# Altium PCB PCB.PcbDoc
Units mm, origin at the board's own origin, x right, y up, seen from the top; angles counter-clockwise.
Board outline 70 x 35.05 mm, 4 copper layers (L1 (Sig), L2 (GND), L3 (GND), L4 (Sig)), stack 1.591 mm thick; 39 components, 40 nets, 205 pads, 130 vias.
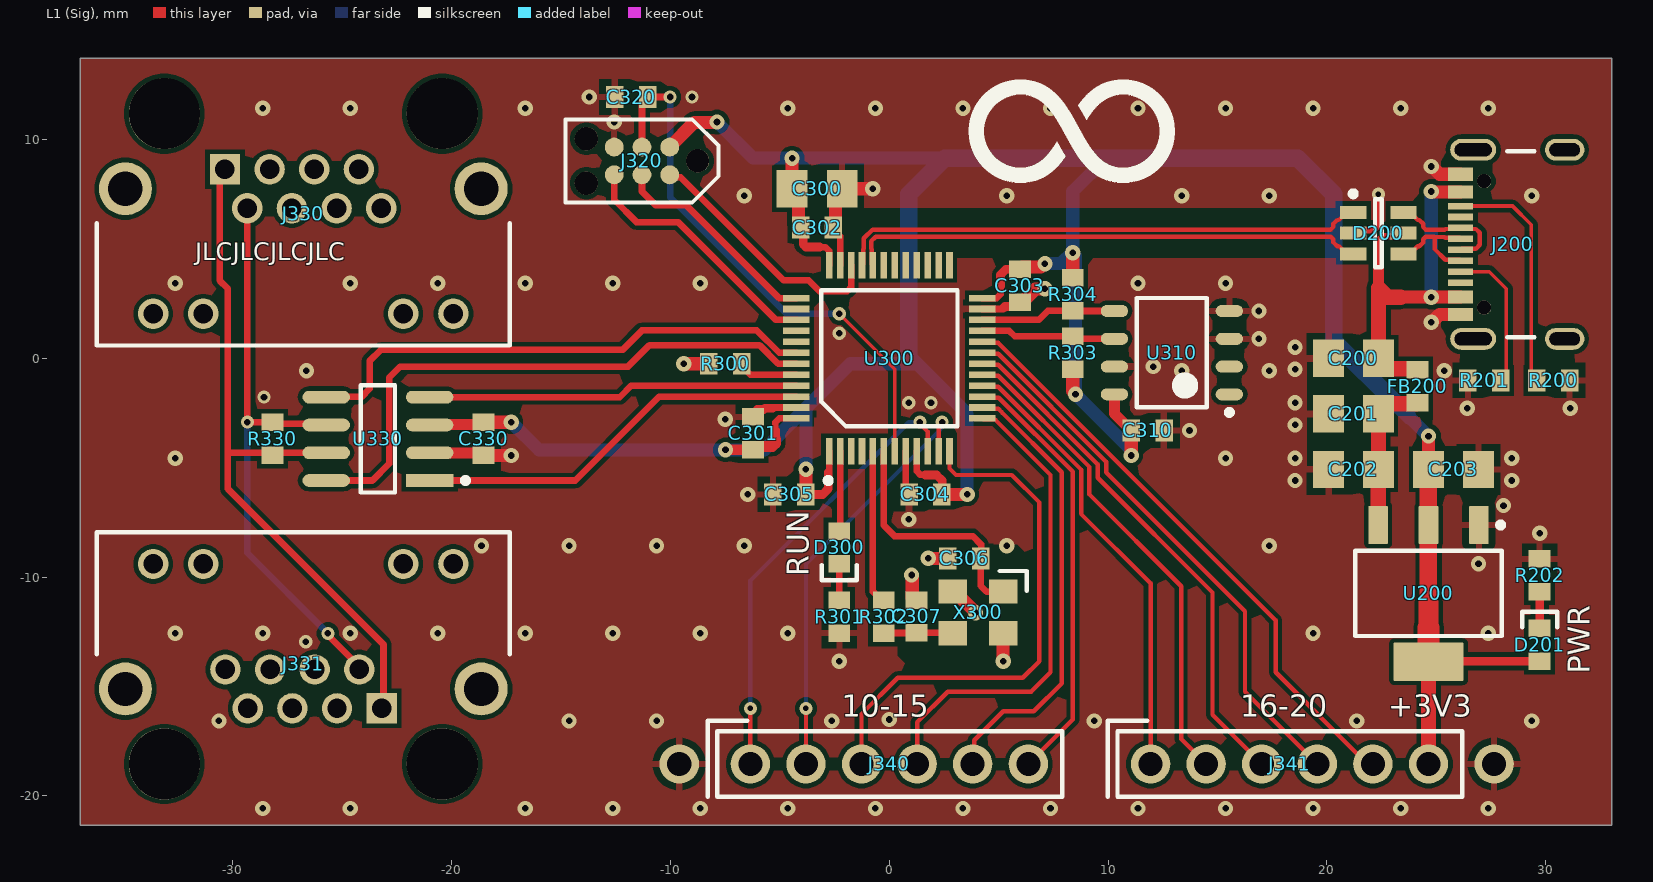
[diagram p0: L1 (Sig) view]
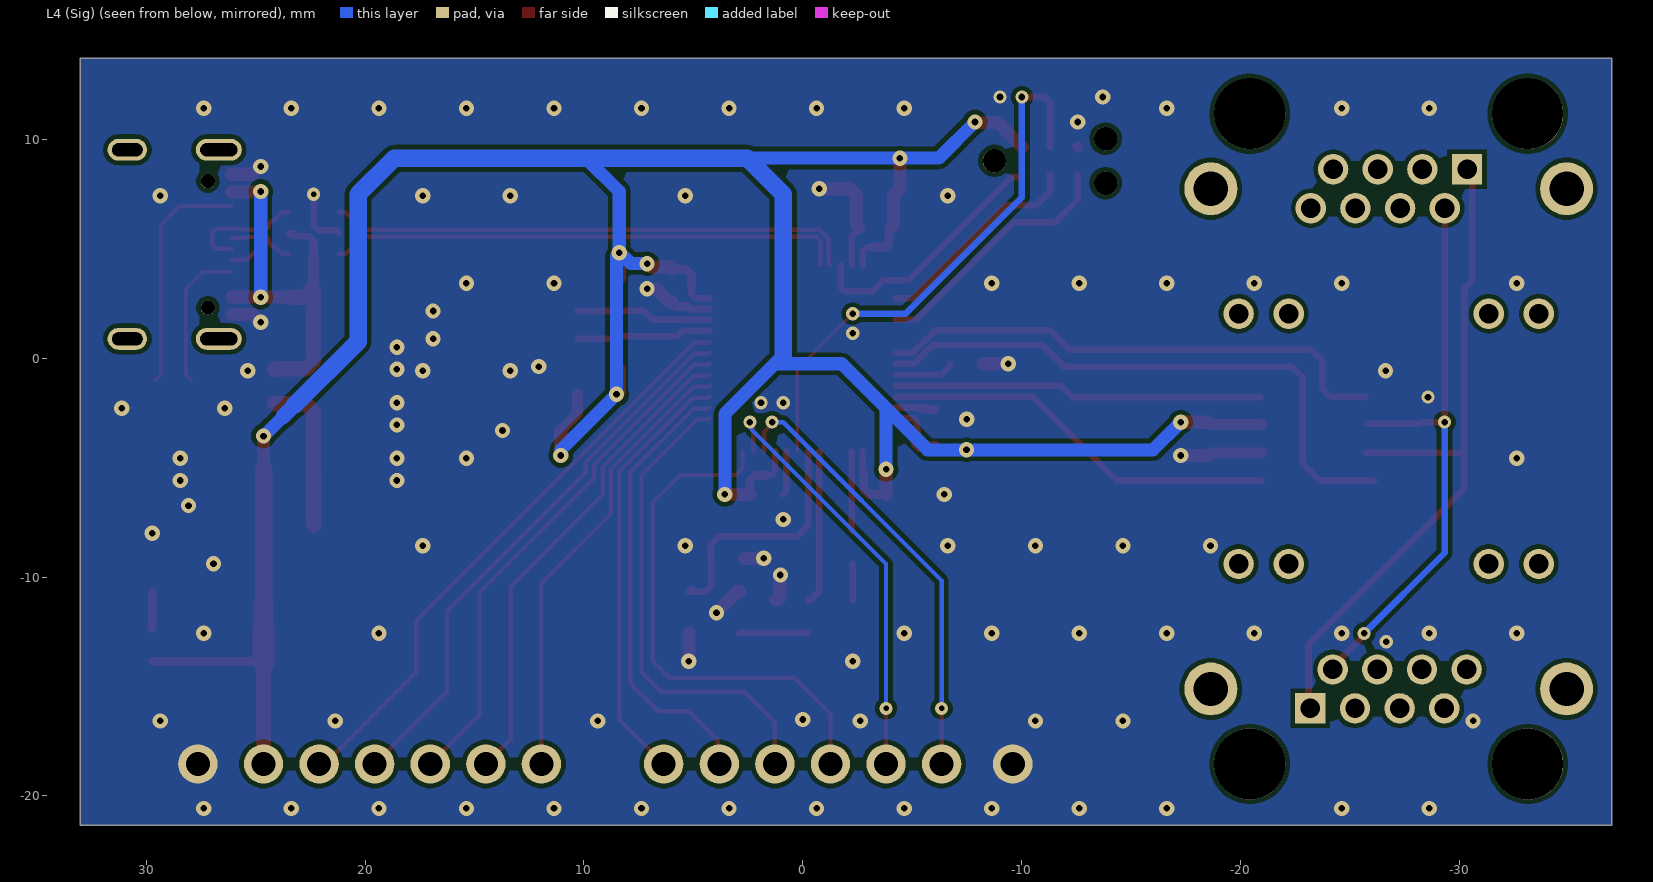
[diagram p1: L4 (Sig) view, seen from below]
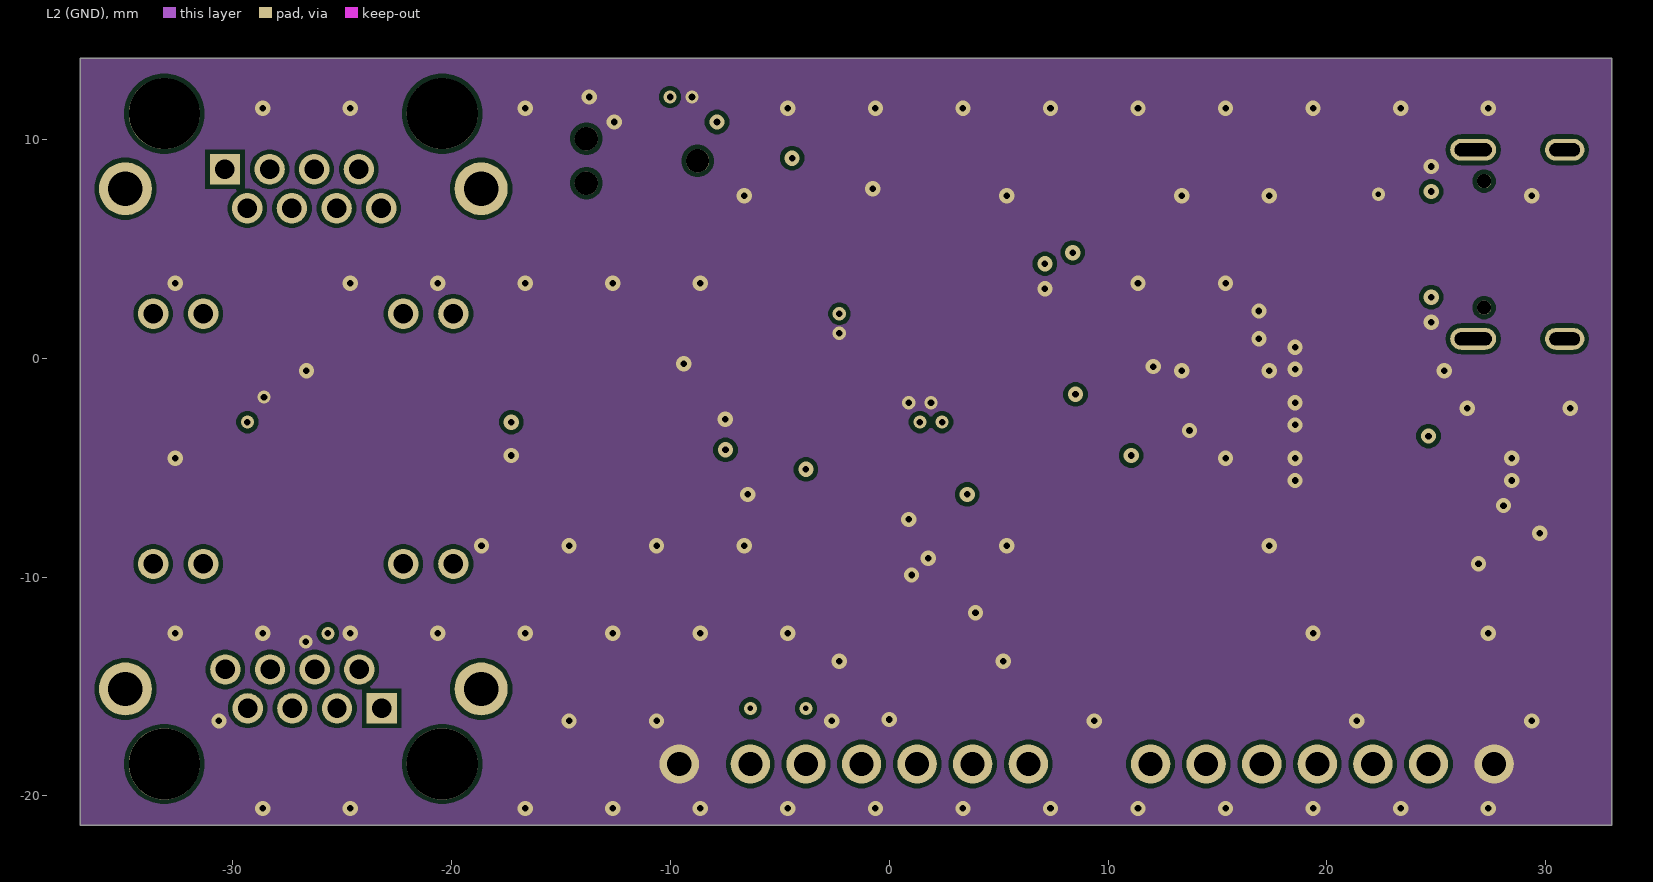
[diagram p2: L2 (GND)]
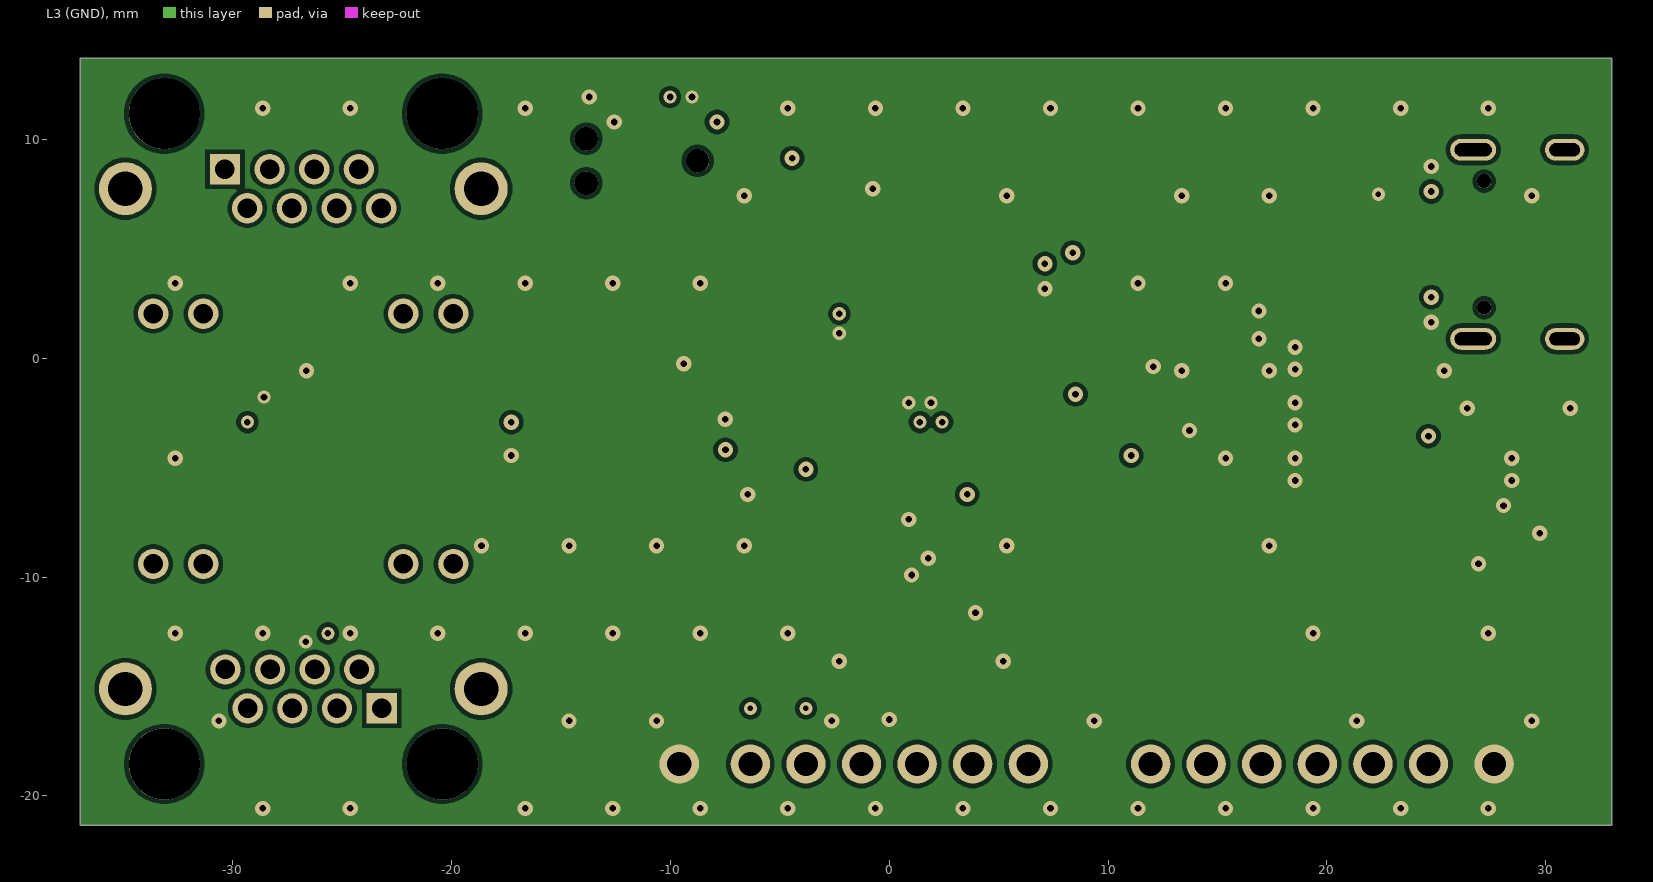
[diagram p3: L3 (GND)]
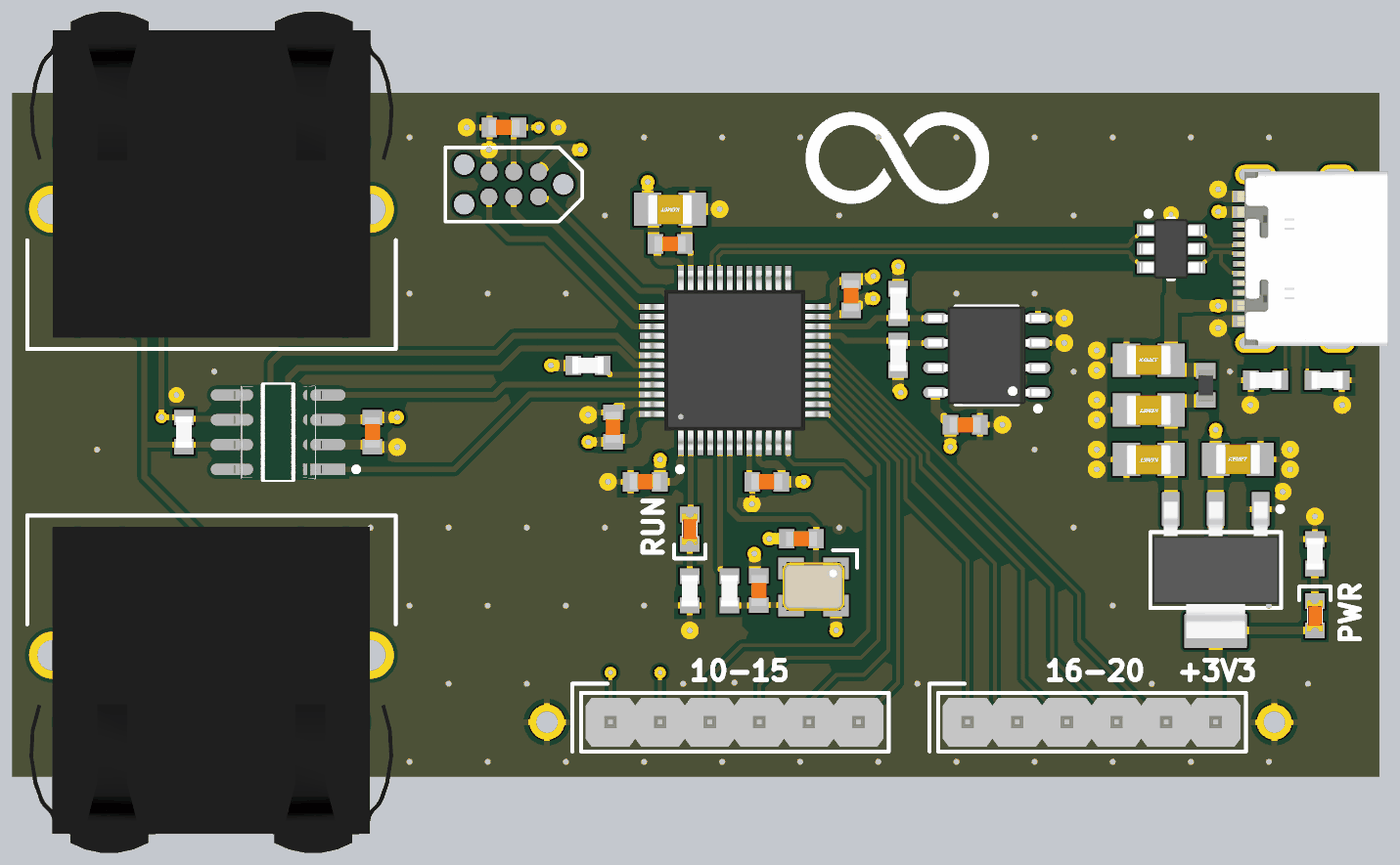
[diagram p4: 3D render of the assembled board from above, using the file's embedded part models]

## Layer stack, top to bottom
Top Solder: solder mask 0.0254, SM-001, Dk 4
L1 (Sig): signal copper 0.035
Dielectric 2: prepreg 0.2104, PP-017, Dk 4.4
L2 (GND): signal copper 0.0175
Dielectric 3: core 1.065, Core-039, Dk 4.6
L3 (GND): signal copper 0.0175
Dielectric 4: prepreg 0.2104, PP-017, Dk 4.4
L4 (Sig): signal copper 0.035
Bottom Solder: solder mask 0.0254, SM-001, Dk 4

## Board outline
-36.98,-21.336 33.02,-21.336 33.02,13.716 -36.98,13.716

## Design rules (kind name [scope] priority, off if disabled: settings)
Clearance [All] p1: gap=0.2 ignorepadtopadclearanceinfootprint=FALSE except(0.089: Arc-Arc Arc-Track Track-Track)
DiffPairsRouting [All] p1: maxlimit=0.127 minlimit=0.127 mostfreqgap=0.127 toplayer_minwidth=0.203 toplayer_maxwidth=0.203 toplayer_prefwidth=0.203 midlayer1_minwidth=0.148 midlayer1_maxwidth=0.148 midlayer1_prefwidth=0.148 midlayer2_minwidth=0.148 midlayer2_maxwidth=0.148 midlayer2_prefwidth=0.148 bottomlayer_minwidth=0.203 bottomlayer_maxwidth=0.203 bottomlayer_prefwidth=0.203 impedanceprofiledriven=TRUE impedanceprofileid={6FCCEE7B-1916-4830-BA7E-104E53B21CAD} impedanceprofilevalue=90.000000 maxuncoupledlength=12.7
HoleSize [All] p1: absolutevalues=TRUE maxlimit=6.3 minlimit=0.2 maxpercent=80.000 minpercent=20.000
MinimumSolderMaskSliver [All] p1: minsoldermaskwidth=0.08
PolygonConnect [All] p1: thpad.connectstyle=Relief thpad.reliefconductorwidth=0.3 thpad.reliefentries=4 thpad.polygonreliefangle="90 Angle" thpad.airgapwidth=0.3 smdpad.connectstyle=Relief smdpad.reliefconductorwidth=0.3 smdpad.reliefentries=4 smdpad.polygonreliefangle="90 Angle" smdpad.airgapwidth=0.3 via.connectstyle=Direct via.reliefconductorwidth=0.254 via.reliefentries=4 via.polygonreliefangle="90 Angle" via.airgapwidth=0.254
RoutingVias [All] p1: holewidth=0.711 width=1.27 viastyle="Through Hole" minholewidth=0.3 minwidth=0.4 maxholewidth=0.711 maxwidth=1.27
SilkToSolderMaskClearance [IsPad] p1: minsilkscreentomaskgap=0.15 clearancetoexposedcopper=TRUE
SolderMaskExpansion [All] p1: expansion=0.102 istentingtop=FALSE
UnRoutedNet [All] p1: checkbadconnections=TRUE
Width [All] p1: maxlimit=1 minlimit=0.089 preferedwidth=0.3 midlayer1_minwidth=0.254 midlayer1_maxwidth=0.254 midlayer1_prefwidth=0.254 midlayer2_minwidth=0.254 midlayer2_maxwidth=0.254 midlayer2_prefwidth=0.254 minimp=50.000000 maximp=50.000000 favimp=50.000000
25 further rules are at their usual default settings.

## Classes and differential pairs
differential pair class DIFF_USB_CON: USB_CON
differential pair class DIFF_USB: USB
component class U_Main: C300 C301 C302 C303 C304 C305 C306 C307 C310 C320 C330 D300 J320 J330 J331 J340 J341 R300 R301 R302 R303 R304 R330 U300 U310 U330 X300
component class Power: C200 C201 C202 C203 D200 D201 FB200 J200 R200 R201 R202 U200
differential pair USB_CON: +USB_CON_P -USB_CON_N
differential pair USB: +USB_P -USB_N

## Components (designator, comment, footprint, x,y, rotation, side; value= is the part's Value field where it differs from the comment)
C200 "2u2" CAP_0805 21.209,0 r0 top
C201 "2u2" CAP_0805 21.209,-2.54 r180 top
C202 "1u" CAP_0805 21.209,-5.08 r180 top
C203 "1u" CAP_0805 25.781,-5.08 r0 top
C300 "4u7" CAP_0805 -3.302,7.747 r180 top
C301 "100n" CAP_0603 -6.223,-3.429 r270 top
C302 "100n" CAP_0603 -3.302,5.969 r180 top
C303 "100n" CAP_0603 5.969,3.314 r90 top
C304 "100n" CAP_0603 1.651,-6.223 r0 top
C305 "100n" CAP_0603 -4.572,-6.223 r0 top
C306 "10p" CAP_0603 3.429,-9.144 r180 top
C307 "10p" CAP_0603 1.246,-11.799 r270 top
C310 "100n" CAP_0603 11.811,-3.302 r0 top
C320 "100n" CAP_0603 -11.799,11.938 r0 top
C330 "100n" CAP_0603 -18.542,-3.683 r90 top
D200 "USBLC6-2SC6" STM-SOT23-6L_V 22.345,5.715 r0 top
D201 "RED" LED_0603_RED 29.718,-13.093 r270 top
D300 "RED" LED_0603_RED -2.286,-8.648 r90 top
FB200 "120R" FB_0603 24.13,-1.282 r270 top
J200 "USB4105-GF-A-060" USB4105-GF-A-060 28.484,5.205 r90 top
J320 "TC2030-NL" TC2030-NL-FP -11.303,9.017 r180 top
J330 "2-406549-1" FP-2-406549-1-MFG -26.78,9.056 r180 top
J331 "2-406549-1" FP-2-406549-1-MFG -26.78,-16.422 r0 top
J340 "G800W302018EU" G800W302018EU 0,-18.542 r90 top
J341 "G800W302018EU" G800W302018EU 18.288,-18.542 r90 top
R200 "5k1" RES_0603 30.341,-1.016 r180 top
R201 "5k1" RES_0603 27.19,-1.016 r0 top
R202 "1k" RES_0603 29.718,-9.918 r90 top
R300 "5k1" RES_0603 -7.493,-0.254 r180 top
R301 "1k" RES_0603 -2.286,-11.811 r270 top
R302 "0R" RES_0603 -0.254,-11.811 r270 top
R303 "2k2" RES_0603 8.382,0.254 r270 top
R304 "2k2" RES_0603 8.382,2.921 r90 top
R330 "120R" RES_0603 -28.194,-3.683 r270 top
U200 "TLV1117LV33DCYR" DCY0004A_N 24.638,-10.745 r270 top
U300 "STM32L552" LQFP48 0,0 r90 top
U310 "M24C08-WMN6TP" STM-SOIC-8_L 12.912,0.254 r180 top
U330 "TCAN334GDR" FP-D0008A-IPC_B -23.368,-3.683 r180 top
X300 "24MHz" XTAL_3225 4.047,-11.618 r180 top

## Footprints (in the part's own frame and the unit in brackets; to place one, negate y for a bottom-side part, rotate by r counter-clockwise, add the part's x,y. Pads: shape width x height; smd on the part's side, far side on the other; paste and mask are expansions set on the pad)
CAP_0603 [mm]
  rect 0.8x1 smd: 1(-0.75,0) 2(0.75,0)
  body extent -0.8,-0.4 0.8,0.4, height 0.51
CAP_0805 [mm]
  rect 1.4x1.7 smd: 1(-1.143,0) 2(1.143,0)
  body extent -1.15,-0.76 1.15,0.79, height 1.01
DCY0004A_N [mm] "SOT223, 4-Leads, Body 6.7x3.7mm, Pitch 2.3mm, IPC Medium Density"
  rrect11% 1.75x0.9 smd: 1(-3.125,2.3) 2(-3.125,0) 3(-3.125,-2.3)
  rrect6% 1.75x3.2 smd: 4(3.125,0)
  silkscreen extent -3.25,-3.35 1.95,3.43, body extent -3.5,-3.25 3.5,3.25, height 1.62
FB_0603 [mm]
  rect 0.8x1 smd: 1(-0.75,0) 2(0.75,0)
  body extent -0.8,-0.4 0.8,0.4, height 0.81
FP-2-406549-1-MFG [mm]
  rect 1.39x1.39 hole 0.89 paste-1000 mask+0: 1(3.58,0.42)
  round 1.39 hole 0.89 paste-1000 mask+0: 2(2.56,2.2) 3(1.54,0.42) 4(0.52,2.2) 5(-0.5,0.42) 6(-1.52,2.2) 7(-2.54,0.42) 8(-3.56,2.2) 9(-6.86,7.02) 10(-4.57,7.02) 11(4.57,7.02) 12(6.86,7.02)
  round 2.42 hole 1.57 paste-1000 mask+0: 13(-8.13,1.31) 14(8.13,1.31)
  round 3.25 hole 3.25 unplated paste-1000 mask+0: ""(-6.35,-2.12) ""(6.35,-2.12)
  silkscreen extent -9.44,2.9 9.44,8.47, body extent -9.53,-8.57 9.53,8.57, height 0.25
FP-D0008A-IPC_B [mm]
  rect 2.169x0.582 smd paste+0 mask+0: 1(-2.364,1.905)
  rrect100% 2.169x0.582 smd paste+0 mask+0: 2(-2.364,0.635) 3(-2.364,-0.635) 4(-2.364,-1.905) 5(2.364,-1.905) 6(2.364,-0.635) 7(2.364,0.635) 8(2.364,1.905)
  silkscreen extent -4.12,-2.45 0.78,2.45, body extent -3.7,-2.7 3.7,2.7, height 0.25
G800W302018EU [mm]
  round 1.8 hole 1.1 mask+0.07: 1(0,6.35) 2(0,3.81) 3(0,1.27) 4(0,-1.27) 5(0,-3.81) 6(0,-6.35)
  silkscreen extent -1.5,-7.9 1.97,8.3, body extent -1.25,-7.62 1.25,7.62, height 8.61
LED_0603_RED [mm]
  rect 0.8x1 smd: A(0.75,0) K(-0.75,0)
  silkscreen extent -1.5,-0.8 -0.8,0.8, body extent -0.8,-0.4 0.8,0.4, height 0.6
LQFP48 [mm]
  rect 1.2x0.3 smd mask+0.05: 1(-4.25,2.75) 2(-4.25,2.25) 3(-4.25,1.75) 4(-4.25,1.25) 5(-4.25,0.75) 6(-4.25,0.25) 7(-4.25,-0.25) 8(-4.25,-0.75) 9(-4.25,-1.25) 10(-4.25,-1.75) 11(-4.25,-2.25) 12(-4.25,-2.75) 25(4.25,-2.75) 26(4.25,-2.25) 27(4.25,-1.75) 28(4.25,-1.25) 29(4.25,-0.75) 30(4.25,-0.25) 31(4.25,0.25) 32(4.25,0.75) 33(4.25,1.25) 34(4.25,1.75) 35(4.25,2.25) 36(4.25,2.75)
  rect 0.3x1.2 smd mask+0.05: 13(-2.75,-4.25) 14(-2.25,-4.25) 15(-1.75,-4.25) 16(-1.25,-4.25) 17(-0.75,-4.25) 18(-0.25,-4.25) 19(0.25,-4.25) 20(0.75,-4.25) 21(1.25,-4.25) 22(1.75,-4.25) 23(2.25,-4.25) 24(2.75,-4.25) 37(2.75,4.25) 38(2.25,4.25) 39(1.75,4.25) 40(1.25,4.25) 41(0.75,4.25) 42(0.25,4.25) 43(-0.25,4.25) 44(-0.75,4.25) 45(-1.25,4.25) 46(-1.75,4.25) 47(-2.25,4.25) 48(-2.75,4.25)
  silkscreen extent -5.71,-3.11 3.11,3.11, body extent -4.6,-4.6 4.6,4.6, height 1.6
RES_0603 [mm]
  rect 0.8x1 smd: 1(-0.75,0) 2(0.75,0)
  body extent -0.8,-0.43 0.8,0.43, height 0.52
STM-SOIC-8_L [mm] "SOIC, 8-Leads, Body 5x4mm, Pitch 1.27mm, IPC High Density"
  oval 1.25x0.55 smd: 1(-2.625,1.905) 2(-2.625,0.635) 3(-2.625,-0.635) 4(-2.625,-1.905) 5(2.625,-1.905) 6(2.625,-0.635) 7(2.625,0.635) 8(2.625,1.905)
  silkscreen extent -2.75,-2.5 1.6,2.85, body extent -3,-2.5 3,2.5, height 1.75
STM-SOT23-6L_V [mm] "SOT23, 6-Leads, Body 3.05x1.75mm, Pitch 0.95mm"
  rect 1.2x0.6 smd: 1(-1.15,0.95) 2(-1.15,0) 3(-1.15,-0.95) 4(1.15,-0.95) 5(1.15,0) 6(1.15,0.95)
  silkscreen extent -1.27,-1.55 0.15,1.92, body extent -1.6,-1.53 1.6,1.53, height 1.45
TC2030-NL-FP [mil]
  round 33.98 smd: 1(-50,-25) 2(-50,25) 3(0,-25) 4(0,25) 5(50,-25) 6(50,25)
  round 42.01 hole 42.01 unplated: MH(-100,0) MH(100,-40) MH(100,40)
  silkscreen extent -138,-75 138,75
USB4105-GF-A-060 [mm]
  rect 0.6x1.15 smd mask+0.05: A1B12(-3.2,2.378) A4B9(-2.4,2.378) B1A12(3.2,2.378) B4A9(2.4,2.378)
  rect 0.3x1.15 smd mask+0.05: A5(-1.25,2.378) A6(-0.25,2.378) A7(0.25,2.378) A8(1.25,2.378) B5(1.75,2.378) B6(0.75,2.378) B7(-0.75,2.378) B8(-1.75,2.378)
  round 0.65 hole 0.65 unplated mask+0.05: MH(-2.89,1.303) MH(2.89,1.303)
  oval 1x1.8 hole 0.6 slot 1.4 at 90 deg: SH(-4.32,-2.377) SH(4.32,-2.377)
  oval 1x2.1 hole 0.6 slot 1.7 at 90 deg: SH(-4.32,1.803) SH(4.32,1.803)
  silkscreen extent -4.25,-1 4.25,0.25, body extent -4.47,-4.97 4.47,2.73, height 3.27
XTAL_3225 [mm]
  rect 1.3x1.1 smd: 1(-1.15,-0.95) 2(1.15,-0.95) 3(1.15,0.95) 4(-1.15,0.95)
  silkscreen extent -2.23,-1.89 -1,-1, body extent -1.6,-1.28 1.6,1.22, height 0.61

## Part data
C200 C201 C202 C203 C300: library part CAP_0805_16V, "Capacitor SMD 0805 16V"
C301 C302 C303 C304 C305 C306 C307 C310 C320 C330: library part CAP_0603_16V, "Capacitor SMD 0603 16V"
D200: library part CMP-2000-05378-1, "Very low capacitance ESD protection, 3.5 pF, -40 to 125 degC, 6-Pin SOT23, RoHS, Tape and Reel", Capacitance Value=3.5pF, Clamping Voltage=17V, Leakage Current=0.15uA, Manufacturer=STMicroelectronics, Operating Temp Range=-40Cto125C, Operating Temperature Classification=Automotive, Operating Temperature Max Deg. C=125C, Operating Temperature Min Deg. C=-40C, Package / Case=SOT-23, Package Description="6-Pin Small Outline Transistor, Body 2.925 x 1.625 mm, Pitch 0.95 mm", Package Reference=SOT23-6L, Peak Pulse Current=5A, Reverse Breakdown Voltage=6V, Reverse Stand-off Voltage=5V, Test Current (It)=1mA, Clamping Voltage (Max)=17V, Configuration=Dual, Datasheet URL=http://www.st.com/st-web-ui/static/active/en/resource/technical/document/datasheet/CD00050750.pdf, Datasheet Version="Rev. 5, 10/2011", Direction Type=Uni-Directional, Leakage Current (Max)=0.15uA, Manufacturer URL=http://www.st.com/, Mounting=SurfaceMount, Mounting Style=SurfaceMount, Number of Elements=1, Packaging=TapeandReel, Pin Count=6, Polarity=Uni-Directional, Product Depth (mm)=1.75mm, Product Height (mm)=1.3mm, Product Length (mm)=3.05mm, Rad Hardened=No, Suppressor Type=DiodeArrays, Working Voltage=5V, Working Voltage (Max)=5V
D201 D300: library part LED_0603_RED, "LED 0603 RED SMD"
FB200: library part FB_0603, "Ferrite Bead SMD 0603"
J200: "USB Connector Type C SMT 12 Pin", Manufacturer=GCT, Manufacturer Part Number=USB4105-GF-A-060
J320: "Tag-Connect No-Solder SWD Debug Connector (No Legs) DO NOT PLACE", Manufacturer=Tag-Connect, Manufacturer Part Number=TC2030-NL-FP
J330 J331: library part CMP-2000-05541-2, "CONN MOD JACK 8P8C R/A SHIELDED", Color=Yellow, Current Rating=1.5A, Flammability Rating="UL94 V-0", Housing Color=Black, Max Operating Temperature=85°C, Max Voltage Rating (AC)=150V, Min Operating Temperature=-40°C, Package Quantity=63, Approvals=UL, Connector Type=Jack, Contact Material=Bronze, Contact Plating=Gold, Depth=15.75mm, Direction=Up, Element Configuration=Single, Gender=Female, Housing Material=Thermoplastic, Keyed=No, Length=17.86mm, Mount=Panel, Number of Contacts=8, Number of Ports=1, Number of Positions=8, Number of Positions Loaded=8, Number of Rows=1, Orientation="Right Angle", Packaging=Tray, PCB Mounting Orientation="Right Angle", PCB Thickness=1.57mm, Pitch=2.03mm, Radiation Hardening=No, RoHS Compliant=Yes, Series=-, Shielding=Shielded, Tail Length=2.54mm, Termination=Solder, Voltage Rating=150V, Weight=0.144729oz, Width=17.27mm
J340 J341: "Pin Header 6 Position 2.54mm Pitch", Manufacturer=Amphenol, Manufacturer Part Number=G800W302018EU
R200 R201 R202 R300 R301 R302 R303 R304 R330: library part RES_0603, "Resistor SMD 0603"
U200: library part CMP-0395-00503-2, "Single Output LDO, 1 A, Fixed 3.3 V Output, 2 to 5.5 V Input, 4-pin SOT-223 (DCY), -40 to 125 degC, Green (RoHS & no Sb/Br)", Manufacturer="Texas Instruments", Accuracy(%)=2, Code_JEDEC=TO-261, ComponentLink1Description="Manufacturer URL", ComponentLink1URL=http://www.ti.com/, ComponentLink2Description=Datasheet, ComponentLink2URL=http://www.ti.com/general/docs/lit/getliterature.tsp?genericPartNumber=TLV1117LV33&fileType=pdf, ComponentLink3Description="Package Specification", ComponentLink3URL=http://www.ti.com/litv/pdf/mpds094a, DatasheetVersion=SBVS160A, Eco-Plan="Green (RoHS & no Sb/Br)", Fixed Output Options(V)=3.3, Iout(Max)(A)=1, Iq(Typ)(mA)=0.05, Mounting Technology="Surface Mount", PackageDescription="4-Pin Plastic Small Outline, Body 3.5 x 6.5 mm, Pitch 2.3 mm", PackageReference=DCY0004A, PackageVersion=4202506/B, PartNumber=TLV1117LV33DCYR, SubFamily="Single Channel LDO", Vdo(Typ)(mV)=1200, Vin(Max)(V)=5.5, Vin(Min)(V)=2, Vout Adj(Max)(V)=3.3, Vout Adj(Min)(V)=3.3
U300: "STM32L552 MCU LQFP-48"
U310: library part CMP-2000-06639-1, "I2C Bus EEPROM, 8 Kbits, 2.5 to 5.5 V, -40 to 85 degC, 8-Pin SOIC, RoHS, Tape and Reel", Frequency=0.4MHz, Manufacturer=STMicroelectronics, Operating Supply Voltage (Max)=5.5V, Operating Supply Voltage (Min)=2.5V, Operating Supply Voltage (Typ)=3.3/5V, Operating Temp Range=-40Cto85C, Operating Temperature (Max)=85C, Operating Temperature (Min)=-40C, Operating Temperature Classification=Industrial, Package Description="8-Pin Small Outline Integrated Circuit, Body 4.9 x 3.9 mm, Pitch 1.27 mm", Package Reference=SOIC-8, Package Type=SOICN, Supply Current=2mA, Access Time (Max)=900ns, Data Retention=40, Datasheet URL=http://www.st.com/content/ccc/resource/technical/document/datasheet/cc/f5/a5/01/6f/4b/47/d2/DM00070057.pdf/files/DM00070057.pdf/jcr:content/translations/en.DM00070057.pdf, Datasheet Version="Rev. 4, 06/2014", DELETED=Compliant, Density=8192Bit, Frequency (Max)=0.4MHz, Interface Type=Serial(I2C), Manufacturer URL=http://www.st.com/, Mounting=SurfaceMount, Mounting Technology=SurfaceMount, Organization=1Kx8, Packaging=TapeandReel, Pin Count=8, Programmable=Yes, Rad Hardened=No, Write Protection=Yes
U330: library part CMP-04872-000213-1, "IC TRANSCEIVER 1/1 8SOIC", Case/Package=SOIC, Max Operating Temperature=125°C, Min Operating Temperature=-40°C, Data Rate=1Mbps, Lead Free="Lead Free", Mount="Surface Mount", Packaging="Tape and Reel", Receiver Hysteresis=120mV, RoHS Compliant=Yes
X300: library part TSX-3225_24.0000MF15X-AC, "Crystal SMD 24MHz 10PPM 7pF 3225", Load Capacitance=7pF, Manufacturer=Epson, Manufacturer Number="TSX-3225 24.0000MF15X-AC", ESR=40R, Type=XTAL

## Free pads (board coordinates)
  round 1.8 hole 1.1 mask+0.07: 3(-9.6,-18.542) 3(27.638,-18.542)

## Via types
v1: diameter 0.7, hole 0.3, L1 (Sig) to L4 (Sig), tented both sides, 69 vias
v2: diameter 0.7, hole 0.3, L1 (Sig) to L4 (Sig), 46 vias
v3: diameter 0.6, hole 0.3, L1 (Sig) to L4 (Sig), 12 vias
v4: diameter 0.6, hole 0.25, L1 (Sig) to L4 (Sig), 3 vias

## Nets (pads, with @x,y where several pads share a name; then routed paths per layer and width w, separated by ;. In a path a pad name is that pad's centre, name@x,y a point inside that pad or via, vN(x,y) a via of type N, cw(c..) or ccw(c..) an arc to the next point about the centre after c; other vN are vias at no path point)
+3V3: C203.1 C300.2 C301.2 C302.2 C303.2 C304.2 C305.2 C310.1 C330.2 D201.A J320.1 J341.6 R303.2 R304.2 U200.2 U200.4 U300.1 U300.9 U300.24 U300.36 U300.48 U310.8 U330.3 | length 154.2
  L1 (Sig) w0.3: -5.207,-3.302 -5.207,-2.926 -5.031,-2.75 U300.48 ; -3.175,5.08 -2.926,5.08 -2.75,4.904 U300.36 ; -2.794,-5.207 -2.75,-5.163 U300.1 ; U300.9 1.25,-5.158 1.426,-5.334 1.651,-5.334 ; U300.24 4.904,2.75 5.08,2.926 5.08,3.302
  L1 (Sig) w0.4: -5.207,-3.683 -5.207,-3.302 ; C302.2 -3.937,5.854 -3.937,5.207 -3.81,5.08 -3.175,5.08 ; C305.2 -3.048,-6.223 -2.794,-5.969 -2.794,-5.207 ; 1.651,-5.334 2.159,-5.334 2.413,-5.588 2.413,-6.211 C304.2 ; 5.08,3.302 5.08,3.81 5.334,4.064 C303.2 ; U200.4 24.665,-13.843 D201.A
  L1 (Sig) w0.5: U330.3@-20.989,-3.032 C330.2@-18.641,-3.032 ; v2(-7.487,-4.185) -7.484,-4.182 -6.226,-4.182 C301.2 -6.073,-4.029 -5.35,-4.029 -5.207,-3.886 -5.207,-3.683 ; U310.8 10.293,-1.657 10.293,-2.534 11.055,-3.296 C310.1
  L1 (Sig) w0.6: C330.2@-18.536,-2.927 v2@-17.278,-2.927 ; J320.1 -8.909,10.776 -7.893,10.776 v2(-7.874,10.795) ; v2(-4.445,9.144) C300.2 -4.148,7.45 -4.148,6.065 C302.2 ; C305.2 -3.816,-6.217 -3.816,-5.086 v2(-3.81,-5.08) ; C304.2 v2(3.556,-6.223) ; C303.2 6.069,4.164 6.931,4.164 7.085,4.318 v2(7.112,4.318) ; R303.2 8.382,-1.497 8.509,-1.624 v2(8.509,-1.651) ; R304.2 v2(8.382,4.826) ; v2(11.049,-4.445) 11.055,-4.439 C310.1@11.055,-3.296 ; C203.1 v2(24.638,-3.556)
  L1 (Sig) w0.7: J341.6 U200.4
  L1 (Sig) w0.8: 24.638,-11.176 U200.2 C203.1
  L1 (Sig) w0.9: 24.638,-12.319 24.638,-11.176
  L1 (Sig) w1: U200.4 24.638,-12.319
  L4 (Sig) w0.6: v2(-17.272,-2.921) -16.008,-4.185 v2(-7.487,-4.185) -5.709,-4.185 -3.81,-2.286 ; v2(-7.874,10.795) -6.223,9.144 2.54,9.144 ; v2(-3.81,-5.08) -3.81,-2.286 ; 0.889,0.127 1.27,-0.254 ; v2(3.556,-6.223) 3.556,-2.54 1.27,-0.254 ; v2(7.112,4.318) 7.131,4.337 7.866,4.337 8.355,4.826 v2(8.382,4.826) ; 9.906,9.144 8.382,7.62 v2(8.382,4.826) ; v2(11.049,-4.445) 11.03,-4.426 11.03,-4.172 v2(8.509,-1.651) 8.509,4.672 8.382,4.799 v2(8.382,4.826) ; 23.749,-2.667 v2(24.638,-3.556) ; -3.81,-2.286 -1.778,-0.254 1.27,-0.254
  L4 (Sig) w0.7: 23.241,-2.159 23.749,-2.667
  L4 (Sig) w0.8: 0.889,0.127 0.889,7.493 2.54,9.144 9.906,9.144 18.669,9.144 20.32,7.493 20.32,0.762 23.241,-2.159
+5V: C201.1 C202.1 FB200.2 U200.3 | length 7.8
  L1 (Sig) w0.7: U200.3 22.345,-7.613 22.345,-5.087 C202.1 ; C202.1@22.352,-5.715 C201.1 22.352,-2.432 22.702,-2.082 24.08,-2.082 FB200.2
BOOT: R300.1 U300.44 | length 2.8
  L1 (Sig) w0.3: R300.1 -6.743,-0.354 -6.347,-0.75 U300.44
CAN_RX: U300.45 U330.4 | length 16.9
  L1 (Sig) w0.3: U330.4@-20.938,-1.778 -12.319,-1.778 -11.791,-1.25 U300.45
CAN_SHDN: U300.42 U330.5 | length 23.9
  L1 (Sig) w0.3: U330.5 -25.721,-1.768 -24.12,-1.768 -23.749,-1.397 -23.749,-0.127 -23.241,0.381 -12.192,0.381 -11.303,1.27 -6.054,1.27 -5.034,0.25 U300.42
CAN_STB: U300.43 U330.8 | length 27.1
  L1 (Sig) w0.3: U330.8@-26.123,-5.588 -23.622,-5.588 -22.86,-4.826 -22.86,-0.889 -22.352,-0.381 -11.938,-0.381 -10.955,0.602 -5.936,0.602 -5.084,-0.25 U300.43
CAN_TX: U300.46 U330.1 | length 18.3
  L1 (Sig) w0.3: U330.1@-20.991,-5.588 -14.351,-5.588 -10.513,-1.75 U300.46
GND: C200.1 C201.2 C202.2 C203.2 C300.1 C301.1 C302.1 C303.1 C304.1 C305.1 C306.2 C307.1 C310.2 C320.1 C330.1 D200.2 J200.A1B12 J200.B1A12 J320.5 pad.3 R200.1 R201.1 R202.2 R300.2 R301.2 U200.1 U300.8 U300.23 U300.35 U300.47 U310.3 U310.4 U310.7 U330.2 X300.2 X300.4 | length 27.4
  L1 (Sig) w0.3: -5.334,-2.286 -5.298,-2.25 U300.47 ; C302.1 -2.552,5.869 -2.25,5.567 U300.35 ; U300.8 0.75,-6.072 C304.1 ; U300.23 5.171,2.25 5.207,2.286 ; D200.2 21.322,5.842 22.116,5.842 22.352,6.078 v4(22.352,7.493)
  L1 (Sig) w0.4: C301.1@-6.023,-2.34 -5.743,-2.34 -5.689,-2.286 -5.334,-2.286 ; 5.207,2.286 5.285,2.364 C303.1@5.769,2.364
  L1 (Sig) w0.5: U330.2@-20.989,-4.334 C330.1@-18.641,-4.334 ; J320.5 J320.5@-12.561,9.664
  L1 (Sig) w0.6: C330.1@-18.536,-4.439 v2@-17.278,-4.439 ; v2(-9.398,-0.254) R300.2 ; C302.1 -2.456,6.065 -2.456,7.45 C300.1 v2(-0.762,7.747) ; v2(1.016,-9.906) 1.016,-9.933 1.046,-9.963 1.046,-10.949 1.146,-11.049 C307.1 ; v2(1.778,-9.144) C306.2 ; X300.2 2.997,-10.668 3.937,-11.608 v2(3.937,-11.63) ; X300.4 5.202,-12.573 5.202,-13.838 v2(5.207,-13.843) ; C303.1 6.069,2.564 6.661,3.156 7.093,3.156 v2(7.112,3.175) ; v2(24.765,1.651) 24.792,1.651 25.146,2.005 J200.A1B12 ; v2(24.765,8.763) 24.792,8.763 25.15,8.405 J200.B1A12
  other v1: -28.636,-20.574 -24.636,-20.574 -16.636,-20.574 -12.636,-20.574 -8.636,-20.574 -4.636,-20.574 -0.636,-20.574 3.364,-20.574 7.364,-20.574 11.364,-20.574 15.364,-20.574 19.364,-20.574 23.364,-20.574 27.364,-20.574 -30.636,-16.574 -14.636,-16.574 -10.636,-16.574 -2.636,-16.574 9.364,-16.574 21.364,-16.574 29.364,-16.574 0,-16.51 -32.636,-12.574 -28.636,-12.574 -24.636,-12.574 -20.636,-12.574 -16.636,-12.574 -12.636,-12.574 -8.636,-12.574 -4.636,-12.574 19.364,-12.574 27.364,-12.574 -18.636,-8.574 -14.636,-8.574 -10.636,-8.574 -6.636,-8.574 5.364,-8.574 17.364,-8.574 -32.636,-4.574 15.364,-4.574 -26.636,-0.574 13.364,-0.574 17.364,-0.574 25.364,-0.574 -32.636,3.426 -24.636,3.426 -20.636,3.426 -16.636,3.426 -12.636,3.426 -8.636,3.426 11.364,3.426 15.364,3.426 -6.636,7.426 5.364,7.426 13.364,7.426 17.364,7.426 29.364,7.426 -28.636,11.426 -24.636,11.426 -16.636,11.426 -4.636,11.426 -0.636,11.426 3.364,11.426 7.364,11.426 11.364,11.426 15.364,11.426 19.364,11.426 23.364,11.426 27.364,11.426
  other v2: -2.286,-13.843 26.924,-9.398 29.718,-8.001 0.889,-7.366 28.067,-6.731 -6.477,-6.223 18.542,-5.588 28.448,-5.588 18.542,-4.572 28.448,-4.572 -17.272,-4.445 13.716,-3.302 18.542,-3.048 -7.493,-2.794 26.416,-2.286 31.115,-2.286 18.542,-2.032 18.542,-0.508 12.065,-0.381 18.542,0.508 16.891,0.889 16.891,2.159 -12.573,10.795 -13.716,11.938
  other v3: -26.67,-12.954 0.889,-2.032 1.905,-2.032 -28.575,-1.778 -2.286,1.143 -9.017,11.938
GPIO1: J340.1 U300.10 | length 20.6
  L1 (Sig) w0.2: J340.1 v4(-6.35,-16.002) ; v3(1.397,-2.921) 1.397,-2.997 1.75,-3.35 U300.10
  L4 (Sig) w0.2: v4(-6.35,-16.002) -6.35,-10.16 0.889,-2.921 v3(1.397,-2.921)
GPIO2: J340.2 U300.11 | length 19.6
  L1 (Sig) w0.2: J340.2 v4(-3.81,-16.002) ; U300.11 2.25,-3.192 2.413,-3.029 v3(2.413,-2.921)
  L4 (Sig) w0.2: v4(-3.81,-16.002) -3.81,-9.398 2.336,-3.252 2.336,-2.998 v3(2.413,-2.921)
GPIO3: J340.3 U300.12 | length 24.2
  L1 (Sig) w0.2: J340.3 -1.27,-16.256 0.381,-14.605 6.096,-14.605 6.858,-13.843 6.858,-6.594 5.598,-5.334 3.048,-5.334 2.75,-5.036 U300.12
GPIO4: J340.4 U300.13 | length 22.2
  L1 (Sig) w0.2: J340.4 1.27,-16.637 2.667,-15.24 6.477,-15.24 7.366,-14.351 7.366,-5.334 4.832,-2.8 4.3,-2.8 U300.13
GPIO5: J340.5 U300.14 | length 20.7
  L1 (Sig) w0.2: J340.5 3.877,-18.475 3.877,-17.459 5.207,-16.129 6.604,-16.129 7.874,-14.859 7.874,-5.207 5.15,-2.483 5.15,-2.476 4.974,-2.3 4.3,-2.3 U300.14
GPIO6: J340.6 U300.15 | length 19.8
  L1 (Sig) w0.2: U300.15 4.3,-1.8 5.003,-1.8 8.382,-5.179 8.382,-16.51 J340.6
GPIO7: J341.1 U300.16 | length 20.9
  L1 (Sig) w0.2: U300.16 4.3,-1.3 4.974,-1.3 8.763,-5.089 8.763,-7.112 11.938,-10.287 J341.1
GPIO8: J341.2 U300.17 | length 22.4
  L1 (Sig) w0.2: U300.17 4.3,-0.8 4.974,-0.8 9.144,-4.97 9.144,-6.223 13.335,-10.414 13.335,-17.399 J341.2
GPIO9: J341.3 U300.18 | length 24
  L1 (Sig) w0.2: U300.18 4.3,-0.3 4.974,-0.3 9.525,-4.851 9.525,-5.461 14.767,-10.703 14.767,-16.291 J341.3
GPIO10: J341.4 U300.19 | length 25.5
  L1 (Sig) w0.2: U300.19 4.3,0.2 4.974,0.2 9.906,-4.732 9.906,-5.207 16.256,-11.557 16.256,-15.24 J341.4
GPIO11: J341.5 U300.20 | length 27.2
  L1 (Sig) w0.2: U300.20 4.3,0.7 4.974,0.7 17.653,-11.979 17.653,-14.351 21.844,-18.542 J341.5
I2C1_SCL: R303.1 U300.21 U310.6 | length 6
  L1 (Sig) w0.3: U300.21 5.481,1.25 5.727,1.004 R303.1 ; R303.1@8.509,0.889 U310.6
I2C1_SDA: R304.1 U300.22 U310.5 | length 6.1
  L1 (Sig) w0.3: U300.22 6.83,1.75 7.251,2.171 R304.1 ; R304.1@8.509,2.159 U310.5
LED: D300.A U300.2 | length 3.7
  L1 (Sig) w0.3: D300.A -2.25,-7.862 U300.2
NetC307_2: C307.2 R302.2 X300.3 | length 3.2
  L1 (Sig) w0.3: R302.2 -0.248,-12.555 1.24,-12.555 C307.2 2.878,-12.549 X300.3
NetD300_K: D300.K R301.1 | length 1.7
  L1 (Sig) w0.3: R301.1 D300.K
NetJ330_1: J330.1 J331.1 R330.2 U330.7 | length 32.4
  L1 (Sig) w0.3: J330.1 -30.607,8.389 -30.607,3.556 -30.226,3.175 -30.226,-3.81 -30.226,-5.969 -23.114,-13.081 -23.114,-15.916 J331.1 ; -30.226,-4.318 U330.7
NetJ330_2: J330.2 J331.2 R330.1 U330.6 | length 26.7
  L1 (Sig) w0.3: J330.2 J330.2 v3@-29.338,-2.927 ; v3@-29.331,-2.927 R330.1@-28.212,-2.927 ; R330.1@-28.133,-2.994 U330.6@-25.786,-2.994 ; v3(-25.654,-12.573) -25.654,-12.654 -24.22,-14.088 J331.2
  L4 (Sig) w0.3: v3(-29.337,-2.921) -29.337,-8.89 v3(-25.654,-12.573)
NRST: C320.2 J320.3 U300.7 | length 25.3
  L1 (Sig) w0.17: v3(-2.286,2.032) 0.252,-0.506 0.252,-4.248 U300.7
  L1 (Sig) w0.3: J320.3 -11.303,11.684 C320.2 v3(-10.021,11.938)
  L4 (Sig) w0.3: v3(-10.021,11.938) -10.021,7.354 -4.699,2.032 v3(-2.286,2.032)
OSC_IN: R302.1 U300.5 | length 7.1
  L1 (Sig) w0.3: U300.5 -0.75,-10.665 -0.354,-11.061 R302.1 R302.1@-0.242,-11.049
OSC_OUT: C306.1 U300.6 X300.1 | length 11.4
  L1 (Sig) w0.3: U300.6 -0.25,-7.64 0.238,-8.128 3.81,-8.128 4.191,-8.509 4.191,-9.132 C306.1 4.179,-10.402 4.445,-10.668 X300.1 X300.1@5.056,-10.527
PWR_LED_K: D201.K R202.1 | length 1.7
  L1 (Sig) w0.4: D201.K R202.1
SWCLK: J320.4 U300.37 | length 9.8
  L1 (Sig) w0.3: J320.4 -11.303,7.62 -10.668,6.985 -9.271,6.985 -5.036,2.75 U300.37
SWDIO: J320.2 U300.34 | length 11.6
  L1 (Sig) w0.3: J320.2 -9.925,8.274 -9.544,8.274 -4.826,3.556 -3.683,3.556 -3.19,3.063 -1.926,3.063 -1.75,3.239 U300.34
SWO: J320.6 U300.39 | length 11.7
  L1 (Sig) w0.3: J320.6 -12.573,7.239 -11.557,6.223 -9.652,6.223 -5.179,1.75 U300.39
USB_CC1: J200.A5 R201.2 | length 6.7
  L1 (Sig) w0.17: J200.A5 27.414,3.955 28.194,3.175 28.194,-0.762 R201.2
USB_CC2: J200.B5 R200.2 | length 10.8
  L1 (Sig) w0.17: J200.B5 28.478,6.955 29.337,6.096 29.337,-0.762 R200.2
USB_CON_N: D200.4 J200.A7 J200.B7 | length 5
  L1 (Sig) w0.203: D200.4 23.795,4.765 24.143,5.113 24.22,5.113 24.397,5.29 24.397,5.431 24.515,5.55 24.906,5.55 24.916,5.54 ; J200.B7 26.058,4.503 25.406,4.503 24.916,4.993 24.916,5.54 ; J200.A7 26.058,5.503 25.406,5.503 25.37,5.54 24.916,5.54
USB_CON_P: D200.6 J200.A6 J200.B6 | length 5.5
  L1 (Sig) w0.203: D200.6 23.795,6.665 24.143,6.317 24.22,6.317 24.397,6.14 24.397,5.999 24.515,5.88 25.043,5.88 25.053,5.87 25.37,5.87 25.406,5.907 26.058,5.907 J200.B6 26.154,5.907 26.806,5.907 26.983,5.73 26.983,5.18 26.806,5.003 26.154,5.003 J200.A6
USB_N: D200.3 U300.32 | length 23.7
  L1 (Sig) w0.203: U300.32 -0.798,4.298 -0.798,4.975 -0.835,5.011 -0.835,5.341 -0.626,5.55 20.175,5.55 20.293,5.431 20.293,5.29 20.47,5.113 20.547,5.113 20.895,4.765 D200.3
USB_P: D200.1 U300.33 | length 24.2
  L1 (Sig) w0.203: U300.33 -1.202,4.298 -1.202,4.975 -1.165,5.011 -1.165,5.478 -0.763,5.88 20.175,5.88 20.293,5.999 20.293,6.14 20.47,6.317 20.547,6.317 20.895,6.665 D200.1
VBUS: C200.2 D200.5 FB200.1 J200.A4B9 J200.B4A9 | length 19.1
  L1 (Sig) w0.3: 22.352,5.207 22.352,5.389 22.528,5.565 23.345,5.565 D200.5 D200.5@23.195,5.715
  L1 (Sig) w0.4: 22.352,4.572 22.352,5.207
  L1 (Sig) w0.5: 22.352,3.214 22.352,4.572
  L1 (Sig) w0.6: 23.368,2.794 v2(24.765,2.794) 24.776,2.805 J200.A4B9 ; v2(24.765,7.62) 24.78,7.605 J200.B4A9
  L1 (Sig) w0.7: 23.368,2.794 22.772,2.794 22.352,3.214 C200.2 22.352,-0.132 22.702,-0.482 24.08,-0.482 FB200.1
  L4 (Sig) w0.6: v2(24.765,2.794) v2(24.765,7.62)
pads on no net: J200.A8 J200.B8 J200.MH J200.SH J320.MH J330. J330.3 J330.4 J330.5 J330.6 J330.7 J330.8 J330.9 J330.10 J330.11 J330.12 J330.13 J330.14 J331. J331.3 J331.4 J331.5 J331.6 J331.7 J331.8 J331.9 J331.10 J331.11 J331.12 J331.13 J331.14 U300.3 U300.4 U300.25 U300.26 U300.27 U300.28 U300.29 U300.30 U300.31 U300.38 U300.40 U300.41 U310.1 U310.2

## Polygon pours and split planes (outlines as drawn)
GND on L2 (GND) "GND_L02_P001" (solid, pour order 1): -36.98,13.716 -36.98,-21.336 33.02,-21.336 33.02,13.716
GND on L3 (GND) "GND_L03_P002" (solid, pour order 2): -36.98,13.716 -36.98,-21.336 33.02,-21.336 33.02,13.716
GND on L4 (Sig) "GND_L04_P003" (solid, pour order 3): -36.98,13.716 33.02,13.716 33.02,-21.336 -36.98,-21.336
GND on L1 (Sig) "GND_L01_P000" (solid, pour order 0): -36.98,13.716 33.02,13.716 33.02,-21.336 -36.98,-21.336

## Other copper
L1 (Sig):
  pour cut-out: 6.604,-9.271 6.552,-9.323 6.552,-13.716 5.917,-14.351 1.143,-14.351 0.381,-13.589 0.381,-9.271 1.143,-8.509 5.842,-8.509
  pour cut-out: -1.905,6.858 21.082,6.858 21.209,6.731 21.209,4.929 20.852,4.572 -1.905,4.572

## Silkscreen, mask and mechanical layers (free items; w line width, h text height)
Top Overlay:
  region: 6105 vertices and 0 holes, not listed, extent 3.639,8.024 13.037,12.723
  text "JLCJLCJLCJLC" at -31.727,4.468 h0.8
  text "RUN" at -3.683,-9.969 h1 r90
  text "PWR" at 32.004,-14.414 h1 r90
  text "10-15" at -2.166,-16.383 h1
  text "16-20" at 16.039,-16.383 h1
  text "+3V3" at 22.805,-16.383 h1
Mechanical 1:
  lines w0.254: -36.98,13.664 -36.98,-21.336 33.02,-21.336 ; -36.98,13.716 33.02,13.716 33.02,-21.284

## Text inside footprints (layer, text, board x,y; h text height)
D201: Mechanical 13 "+" at 30.326,-14.41 h0.5 r270
D300: Mechanical 13 "+" at -2.894,-7.331 h0.5 r90